# Altium PCB DSP6748_F.PcbDoc (part 4 of 16)
Units mil, origin at the board's own origin, x right, y up, seen from the top; angles counter-clockwise.
Board outline 8188.98 x 4055.12 mil, 4 copper layers (Top Layer, GND, VCC, Bottom Layer); 409 components, 262 nets, 1424 pads, 350 vias.
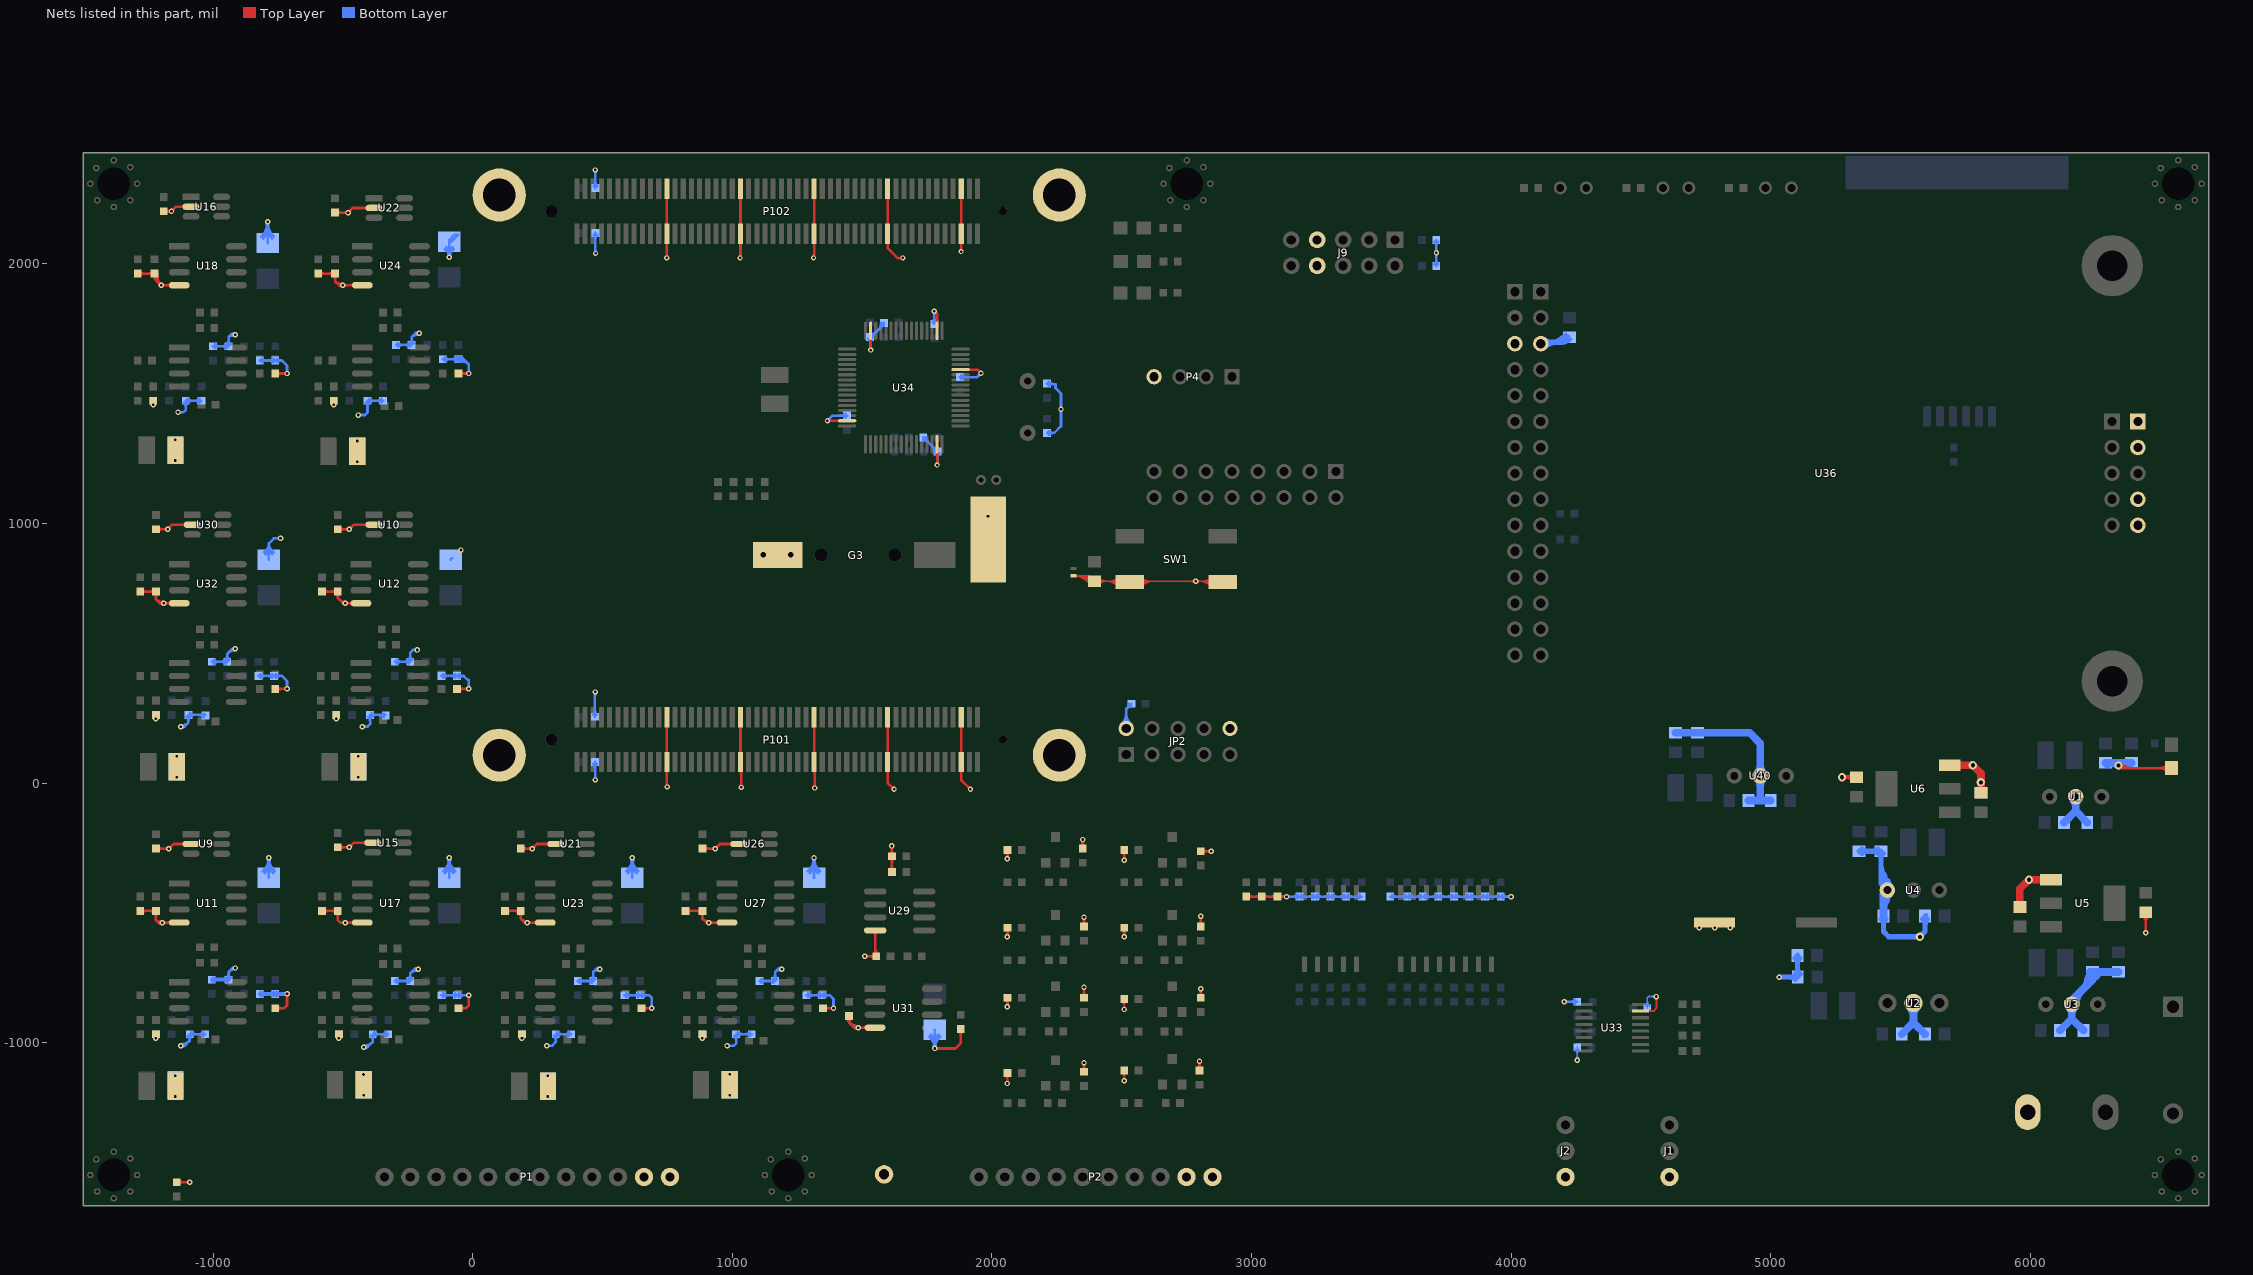
[diagram p6: the nets of this part, all layers, seen from the top]

## Via types
v1: diameter 21, hole 10, Top Layer to Bottom Layer, 244 vias
v2: diameter 20, hole 10, Top Layer to Bottom Layer, 84 vias
v3: diameter 32, hole 16, Top Layer to Bottom Layer, 11 vias
v4: diameter 24, hole 12, Top Layer to Bottom Layer, 7 vias
v5: diameter 39.37, hole 19.68, Top Layer to Bottom Layer, 3 vias
v6: diameter 30, hole 15, Top Layer to Bottom Layer, 1 vias

## Nets (pads, with @x,y where several pads share a name; then routed paths per layer and width w, separated by ;. In a path a pad name is that pad's centre, name@x,y a point inside that pad or via, vN(x,y) a via of type N, cw(c..) or ccw(c..) an arc to the next point about the centre after c; other vN are vias at no path point) (continued)
GND: (continued)
  Top Layer w10: C80.1@-1290.19,1962.52 C81.1@-1225.19,1962.52 ; C46.1@-1280.19,-492.48 C47.1@-1220.19,-492.48 -1220.19,-527.48 ; C153.1@-1280.19,737.52 C154.1@-1220.19,737.52 -1220.19,707.52 ; C50.1@-1220.19,-252.48 v1(-1170.19,-252.48) -1152.59,-234.88 U9.2@-1085.19,-234.88 ; C155.1@-1220.19,977.52 v1(-1175.19,977.52) -1157.59,995.12 U30.2@-1080.19,995.12 ; C81.1@-1215.27,1961.3 ccw(c-1162.85,1954.86) v1(-1200.19,1917.52) ; -1214.69,1932.02 cw(c-1188.67,1958.03) C81.1@-1225.19,1962.52 ; -1209.33,-538.35 ccw(c-1198.89,-527.91) v1@-1193.57,-541.68 ; -1206.22,693.55 ccw(c-1192.45,707.32) v1@-1189.51,688.07 ; v1@-1205.69,1917.52 ccw(c-1218.97,1917.52) -1209.58,1926.91 ccw(c-1200.19,1936.3) v1@-1200.19,1923.02 ; v1@-1205.5,1918.94 ccw(c-1218.33,1922.38) -1206.83,1929.02 ccw(c-1195.33,1935.66) v1@-1198.77,1922.83 ; v1@-1199.08,-541.37 ccw(c-1208.47,-550.76) -1208.47,-537.48 ccw(c-1208.47,-524.2) v1@-1199.08,-533.59 ; v1@-1197.17,-532.35 cw(c-1204.94,-512.23) -1220.19,-527.48 ; v1@-1194.08,688.63 ccw(c-1203.47,679.24) -1203.47,692.52 ccw(c-1203.47,705.8) v1@-1194.08,696.41 ; v1@-1191.02,697.96 cw(c-1196.16,731.55) -1220.19,707.52 ; C83.1@-1190.19,2202.52 v1(-1160.19,2202.52) -1142.59,2220.12 U16.2@-1085.19,2220.12 ; v1@-1175.19,983.02 ccw(c-1175.19,996.3) -1165.8,986.91 ccw(c-1156.41,977.52) v1@-1169.69,977.52 ; v1@-1170.19,-246.98 ccw(c-1170.19,-233.7) -1160.8,-243.09 ccw(c-1151.41,-252.48) v1@-1164.69,-252.48 ; v1@-1164.08,2198.63 ccw(c-1173.47,2189.24) -1173.47,2202.52 ccw(c-1173.47,2215.8) v1@-1164.08,2206.41 ; v1@-1160.19,2208.02 ccw(c-1160.19,2221.3) -1150.8,2211.91 ccw(c-1141.41,2202.52) v1@-1154.69,2202.52 ; L8.1@-1140.19,-1537.48 v1(-1090.19,-1537.48) ; U11.4@-1130.19,-537.48 -1210.19,-537.48 -1220.19,-527.48 ; U32.4@-1130.19,692.52 -1205.19,692.52 -1220.19,707.52 ; U18.4@-1130.19,1917.52 v1(-1200.19,1917.52) ; C28.1@-760.19,-867.48 -725.19,-867.48 -715.19,-857.48 v1(-715.19,-812.48) ; C137.1@-760.19,362.52 v1(-715.19,362.52) ; C60.1@-760.19,1577.52 v1(-715.19,1577.52) ; C111.1@-595.19,1962.52 C112.1@-530.19,1962.52 -530.19,1932.52 ; C78.1@-580.19,-492.48 C79.1@-520.19,-492.48 -520.19,-527.48 -510.19,-537.48 U17.4@-425.19,-537.48 ; C48.1@-580.19,737.52 C49.1@-520.19,737.52 -520.19,712.52 -500.19,692.52 U12.4@-430.19,692.52 ; C114.1@-530.19,2197.52 v1(-480.19,2197.52) -462.59,2215.12 U22.2@-380.19,2215.12 ; C82.1@-520.19,-247.48 v1(-475.19,-247.48) -457.59,-229.88 U15.2@-385.19,-229.88 ; C51.1@-520.19,977.52 v1(-475.19,977.52) -457.59,995.12 U10.2@-380.19,995.12 ; -516.65,708.98 ccw(c-490.19,735.44) v1@-490.19,698.02 ; -516.22,1918.55 ccw(c-502.45,1932.32) v1@-499.51,1913.07 ; v1@-504.08,1913.63 ccw(c-513.47,1904.24) -513.47,1917.52 ccw(c-513.47,1930.8) v1@-504.08,1921.41 ; v1@-501.02,1922.96 cw(c-506.16,1956.55) -530.19,1932.52 ; v1@-494.08,-541.37 ccw(c-503.47,-550.76) -503.47,-537.48 ccw(c-503.47,-524.2) v1@-494.08,-533.59 ; v1@-480.19,2203.02 ccw(c-480.19,2216.3) -470.8,2206.91 ccw(c-461.41,2197.52) v1@-474.69,2197.52 ; v1@-475.19,-241.98 ccw(c-475.19,-228.7) -465.8,-238.09 ccw(c-456.41,-247.48) v1@-469.69,-247.48 ; v1@-475.19,983.02 ccw(c-475.19,996.3) -465.8,986.91 ccw(c-456.41,977.52) v1@-469.69,977.52 ; U24.4@-425.19,1917.52 -515.19,1917.52 -530.19,1932.52 ; C29.1@-60.19,362.52 v1(-15.19,362.52) ; C59.1@-55.19,-867.48 -25.19,-867.48 -15.19,-857.48 v1(-15.19,-817.48) ; C92.1@-55.19,1577.52 v1(-15.19,1577.52) ; C109.1@124.81,-492.48 C110.1@184.81,-492.48 184.81,-522.48 ; C113.1@184.81,-252.48 v1(229.81,-252.48) 247.41,-234.88 U21.2@319.81,-234.88 ; v1@209.53,-531.99 cw(c207.86,-499.43) 184.81,-522.48 ; v1@229.81,-246.98 ccw(c229.81,-233.7) 239.2,-243.09 ccw(c248.59,-252.48) v1@235.31,-252.48 ; U23.4@279.81,-537.48 199.81,-537.48 184.81,-522.48 ; C91.1@649.81,-867.48 v1(689.81,-867.48) ; v2@743.75,2026.54 ccw(c733.43,2036.86) 748.03,2036.86 ; P101.23@744.6,47.96 cw(c736.33,39.69) 748.03,39.69 cw(c759.73,39.69) P101.23@751.46,47.96 ; P101.23@744.6,113.86 ccw(c736.33,122.13) 748.03,122.13 ccw(c759.73,122.13) P101.23@751.46,113.86 ; P101.24@744.6,221.18 cw(c736.33,212.91) 748.03,212.91 cw(c759.73,212.91) P101.24@751.46,221.18 ; P102.23@744.6,2082.96 cw(c736.33,2074.69) 748.03,2074.69 cw(c759.73,2074.69) P102.23@751.46,2082.96 ; P102.23@744.6,2148.86 ccw(c736.33,2157.13) 748.03,2157.13 ccw(c759.73,2157.13) P102.23@751.46,2148.86 ; P102.24@744.6,2256.18 cw(c736.33,2247.91) 748.03,2247.91 cw(c759.73,2247.91) P102.24@751.46,2256.18 ; v2@747.29,2027.26 v2@748.03,2028 ; 748.03,0.11 ccw(c764.41,0.11) v2@752.83,-11.46 ; P101.24@748.03,254.13 P101.23@748.03,80.91 748.03,-13.74 v2(749.29,-15) ; v2@748.03,2023.74 P102.23@748.03,2115.91 P102.24@748.03,2289.13 ; 748.03,2033.29 ccw(c757.58,2033.29) v2@750.83,2026.54 ; C130.1@819.81,-492.48 C131.1@884.81,-492.48 884.81,-522.48 ; C132.1@884.81,-252.48 v1(934.81,-252.48) 952.41,-234.88 U26.2@1024.81,-234.88 ; v1@909.53,-531.99 cw(c907.86,-499.43) 884.81,-522.48 ; v1@934.81,-246.98 ccw(c934.81,-233.7) 944.2,-243.09 ccw(c953.59,-252.48) v1@940.31,-252.48 ; U27.4@979.81,-537.48 899.81,-537.48 884.81,-522.48 ; v2@1026.75,2026.54 ccw(c1015.3,2037.99) 1031.5,2037.99 ; P101.41@1028.07,47.96 cw(c1013.07,32.95) 1034.29,32.95 ; P101.41@1028.07,113.86 ccw(c1019.8,122.13) 1031.5,122.13 ccw(c1043.2,122.13) P101.41@1034.93,113.86 ; P101.42@1028.07,221.18 cw(c1019.8,212.91) 1031.5,212.91 cw(c1043.2,212.91) P101.42@1034.93,221.18 ; P102.41@1028.07,2082.96 cw(c1019.8,2074.69) 1031.5,2074.69 cw(c1043.2,2074.69) P102.41@1034.93,2082.96 ; P102.41@1028.07,2148.86 ccw(c1019.8,2157.13) 1031.5,2157.13 ccw(c1043.2,2157.13) P102.41@1034.93,2148.86 ; P102.42@1028.07,2256.18 cw(c1019.8,2247.91) 1031.5,2247.91 cw(c1043.2,2247.91) P102.42@1034.93,2256.18 ; v2@1030.29,2026.79 v2@1031.5,2028 ; v2@1030.75,-13.46 ccw(c1022.22,-4.93) 1034.29,-4.93 ccw(c1046.36,-4.93) v2@1037.83,-13.46 ; P101.42@1031.5,254.13 P101.41@1031.5,80.91 1034.29,78.12 v2(1034.29,-17) ; v2@1031.5,2023 P102.41@1031.5,2115.91 P102.42@1031.5,2289.13 ; v2@1309.75,2026.54 ccw(c1297.19,2039.1) 1314.96,2039.1 ; P101.59@1311.53,47.96 cw(c1297.64,34.06) 1317.29,34.06 ; P101.59@1311.53,113.86 ccw(c1303.26,122.13) 1314.96,122.13 ccw(c1326.66,122.13) P101.59@1318.39,113.86 ; P101.60@1311.53,221.18 cw(c1303.26,212.91) 1314.96,212.91 cw(c1326.66,212.91) P101.60@1318.39,221.18 ; P102.59@1311.53,2082.96 cw(c1303.26,2074.69) 1314.96,2074.69 cw(c1326.66,2074.69) P102.59@1318.39,2082.96 ; P102.59@1311.53,2148.86 ccw(c1303.26,2157.13) 1314.96,2157.13 ccw(c1326.66,2157.13) P102.59@1318.39,2148.86 ; P102.60@1311.53,2256.18 cw(c1303.26,2247.91) 1314.96,2247.91 cw(c1326.66,2247.91) P102.60@1318.39,2256.18 ; v2@1313.29,2026.33 v2@1314.96,2028 ; v2@1313.75,-15.46 ccw(c1305.22,-6.93) 1317.29,-6.93 ccw(c1329.36,-6.93) v2@1320.83,-15.46 ; P101.60@1314.96,254.13 P101.59@1314.96,80.91 1317.29,78.58 v2(1317.29,-19) ; v2@1314.96,2023 P102.59@1314.96,2115.91 P102.60@1314.96,2289.13 ; C121.1@1349.81,-867.48 v1(1389.81,-867.48) ; v2(1366.2,1395.57) U34.47@1442.31,1395.57 ; v2@1369.73,1392.03 cw(c1378.27,1383.5) 1378.27,1395.57 cw(c1378.27,1407.64) v2@1369.73,1399.1 ; C147.1@1449.81,-897.48 1449.81,-922.48 ; 1466.89,-939.56 ccw(c1484.81,-921.63) v1@1484.81,-946.98 ; v1@1480.92,-946.37 ccw(c1471.53,-955.76) 1471.53,-942.48 ccw(c1471.53,-929.2) v1@1480.92,-938.59 ; v1@1484.81,-936.98 cw(c1484.81,-887.49) 1449.81,-922.48 ; v1(1509.81,-667.48) R89.1@1554.81,-667.48 ; v2@1529.61,1671.06 ccw(c1521.79,1678.88) 1532.86,1678.88 ; 1532.86,1680.3 ccw(c1545.93,1680.3) v2@1536.69,1671.06 ; U34.31@1532.86,1742.02 1532.86,1667.81 v2(1533.15,1667.52) ; U31.4@1549.81,-942.48 v1(1484.81,-942.48) 1469.81,-942.48 1449.81,-922.48 ; R89.1@1550.32,-662.99 U29.4@1550.32,-567.48 ; P101.77@1595,47.96 cw(c1586.73,39.69) 1598.43,39.69 cw(c1610.13,39.69) P101.77@1601.86,47.96 ; P101.77@1595,113.86 ccw(c1586.73,122.13) 1598.43,122.13 ccw(c1610.13,122.13) P101.77@1601.86,113.86 ; P101.78@1595,221.18 cw(c1586.73,212.91) 1598.43,212.91 cw(c1610.13,212.91) P101.78@1601.86,221.18 ; P102.77@1595,2082.96 cw(c1586.73,2074.69) 1598.43,2074.69 cw(c1610.13,2074.69) P102.77@1601.86,2082.96 ; P102.77@1595,2148.86 ccw(c1586.73,2157.13) 1598.43,2157.13 ccw(c1610.13,2157.13) P102.77@1601.86,2148.86 ; P102.78@1595,2256.18 cw(c1586.73,2247.91) 1598.43,2247.91 cw(c1610.13,2247.91) P102.78@1601.86,2256.18 ; P101.78@1598.43,254.13 P101.77@1598.43,80.91 1598.43,0.86 v2(1623.29,-24) ; P102.78@1598.43,2289.13 P102.77@1598.43,2115.91 1598.43,2060.86 1637.29,2022 v2@1657.29,2022 ; C152.1@1614.81,-342.48 C151.1@1614.81,-282.48 v1(1614.81,-242.48) ; v2@1618.29,-24 ccw(c1606.22,-24) 1614.75,-15.46 ccw(c1623.29,-6.93) v2@1623.29,-19 ; 1642.81,2022 ccw(c1642.81,2037.49) v2@1653.75,2026.54 ; v2@1778.15,1812.52 cw(c1778.15,1800.45) 1786.69,1808.98 cw(c1795.22,1817.52) v2@1783.15,1817.52 ; v2(1778.15,1817.52) 1788.76,1806.91 U34.18@1788.76,1742.02 ; v1(1779.81,-1022.48) 1859.81,-1022.48 1879.81,-1002.48 C150.1@1879.81,-947.48 ; v2@1785.61,1228.06 ccw(c1778.01,1235.66) 1788.76,1235.66 ; 1788.76,1237.53 ccw(c1802.16,1237.53) v2@1792.69,1228.06 ; U34.63@1788.76,1305.02 1788.76,1224.91 v2(1789.15,1224.52) ; v2@1877.75,2050.54 ccw(c1867.77,2060.52) 1881.89,2060.52 ; P101.95@1878.46,47.96 cw(c1870.19,39.69) 1881.89,39.69 cw(c1893.59,39.69) P101.95@1885.32,47.96 ; P101.95@1878.46,113.86 ccw(c1870.19,122.13) 1881.89,122.13 ccw(c1893.59,122.13) P101.95@1885.32,113.86 ; P101.96@1878.46,221.18 cw(c1870.19,212.91) 1881.89,212.91 cw(c1893.59,212.91) P101.96@1885.32,221.18 ; P102.95@1878.46,2082.96 cw(c1870.19,2074.69) 1881.89,2074.69 cw(c1893.59,2074.69) P102.95@1885.32,2082.96 ; P102.95@1878.46,2148.86 ccw(c1870.19,2157.13) 1881.89,2157.13 ccw(c1893.59,2157.13) P102.95@1885.32,2148.86 ; P102.96@1878.46,2256.18 cw(c1870.19,2247.91) 1881.89,2247.91 cw(c1893.59,2247.91) P102.96@1885.32,2256.18 ; U34.12@1879.31,1592.42 1944.25,1592.42 v2(1958.15,1578.52) ; v2(1881.29,2047) 1881.89,2047.6 P102.95@1881.89,2115.91 P102.96@1881.89,2289.13 ; P101.96@1881.89,254.13 P101.95@1881.89,80.91 1881.89,11.4 v2(1917.29,-24) ; 1881.89,2057.62 ccw(c1891.91,2057.62) v2@1884.83,2050.54 ; v2@1912.29,-24 ccw(c1900.22,-24) 1908.75,-15.46 ccw(c1917.29,-6.93) v2@1917.29,-19 ; v2@1953.15,1578.52 ccw(c1941.08,1578.52) 1949.61,1587.06 ccw(c1958.15,1595.59) v2@1958.15,1583.52 ; v1(2509.81,-297.48) R90.1@2509.81,-257.48 ; v1@2795.92,-1076.37 cw(c2786.53,-1085.76) 2799.81,-1085.76 cw(c2813.09,-1085.76) v1@2803.7,-1076.37 ; C115.1@2799.81,-1107.48 v1(2799.81,-1072.48) ; v1@2800.92,-796.37 cw(c2791.53,-805.76) 2804.81,-805.76 cw(c2818.09,-805.76) v1@2808.7,-796.37 ; C119.1@2804.81,-827.48 v1(2804.81,-792.48) ; C134.1@2804.81,-552.48 v1@2804.81,-507.48 ; C138.1@2804.81,-262.48 v1(2844.81,-262.48) ; R129.1@2979.81,-437.48 R130.1@3039.81,-437.48 R131.1@3099.81,-437.48 v1(3134.81,-437.48) ; v1@3130.92,-441.37 ccw(c3121.53,-450.76) 3121.53,-437.48 ccw(c3121.53,-424.2) v1@3130.92,-433.59 ; v3(6339.81,67.52) 6349.81,57.52 D7.K@6544.81,57.52 ; v1(6444.81,-577.48) C20.2@6444.81,-497.48 ; C80.1@-1283.12,1955.45 cw(c-1266.05,1938.38) -1266.05,1962.52 ; C80.1@-1283.12,1955.45 cw(c-1266.05,1938.38) -1266.05,1962.52 ; C80.1@-1283.12,1955.45 cw(c-1266.05,1938.38) -1266.05,1962.52 ; C80.1@-1283.12,1969.59 ccw(c-1266.05,1986.66) -1266.05,1962.52 ; C80.1@-1283.12,1969.59 ccw(c-1266.05,1986.66) -1266.05,1962.52 ; C80.1@-1283.12,1969.59 ccw(c-1266.05,1986.66) -1266.05,1962.52 ; C46.1@-1273.12,-499.55 cw(c-1256.05,-516.62) -1256.05,-492.48 ; C46.1@-1273.12,-499.55 cw(c-1256.05,-516.62) -1256.05,-492.48 ; C46.1@-1273.12,-499.55 cw(c-1256.05,-516.62) -1256.05,-492.48 ; C46.1@-1273.12,-485.41 ccw(c-1256.05,-468.34) -1256.05,-492.48 ; C46.1@-1273.12,-485.41 ccw(c-1256.05,-468.34) -1256.05,-492.48 ; C46.1@-1273.12,-485.41 ccw(c-1256.05,-468.34) -1256.05,-492.48 ; C153.1@-1273.12,730.45 cw(c-1256.05,713.38) -1256.05,737.52 ; C153.1@-1273.12,730.45 cw(c-1256.05,713.38) -1256.05,737.52 ; C153.1@-1273.12,730.45 cw(c-1256.05,713.38) -1256.05,737.52 ; C153.1@-1273.12,744.59 ccw(c-1256.05,761.66) -1256.05,737.52 ; C153.1@-1273.12,744.59 ccw(c-1256.05,761.66) -1256.05,737.52 ; C153.1@-1273.12,744.59 ccw(c-1256.05,761.66) -1256.05,737.52 ; -1249.33,1962.52 cw(c-1249.33,1938.38) C81.1@-1232.26,1955.45 ; -1249.33,1962.52 ccw(c-1249.33,1986.66) C81.1@-1232.26,1969.59 ; -1249.33,1962.52 cw(c-1249.33,1938.38) C81.1@-1232.26,1955.45 ; -1249.33,1962.52 ccw(c-1249.33,1986.66) C81.1@-1232.26,1969.59 ; -1249.33,1962.52 ccw(c-1249.33,1986.66) C81.1@-1232.26,1969.59 ; -1249.33,1962.52 cw(c-1249.33,1938.38) C81.1@-1232.26,1955.45 ; -1244.33,-492.48 cw(c-1244.33,-516.62) C47.1@-1227.26,-499.55 ; -1244.33,-492.48 ccw(c-1244.33,-468.34) C47.1@-1227.26,-485.41 ; -1244.33,-492.48 cw(c-1244.33,-516.62) C47.1@-1227.26,-499.55 ; -1244.33,-492.48 ccw(c-1244.33,-468.34) C47.1@-1227.26,-485.41 ; -1244.33,-492.48 ccw(c-1244.33,-468.34) C47.1@-1227.26,-485.41 ; -1244.33,-492.48 cw(c-1244.33,-516.62) C47.1@-1227.26,-499.55 ; -1244.33,737.52 cw(c-1244.33,713.38) C154.1@-1227.26,730.45 ; -1244.33,737.52 ccw(c-1244.33,761.66) C154.1@-1227.26,744.59 ; -1244.33,737.52 cw(c-1244.33,713.38) C154.1@-1227.26,730.45 ; -1244.33,737.52 ccw(c-1244.33,761.66) C154.1@-1227.26,744.59 ; -1244.33,737.52 ccw(c-1244.33,761.66) C154.1@-1227.26,744.59 ; -1244.33,737.52 cw(c-1244.33,713.38) C154.1@-1227.26,730.45 ; C81.1@-1231.19,1954.52 cw(c-1240.19,1942.52) -1225.19,1942.52 ; C81.1@-1231.19,1954.52 cw(c-1240.19,1942.52) -1225.19,1942.52 ; C81.1@-1231.19,1954.52 cw(c-1240.19,1942.52) -1225.19,1942.52 ; C81.1@-1231.19,1954.52 cw(c-1240.19,1942.52) -1225.19,1942.52 ; C81.1@-1231.19,1954.52 cw(c-1240.19,1942.52) -1225.19,1942.52 ; C47.1@-1227.26,-499.55 cw(c-1244.33,-516.62) -1220.19,-516.62 ; C47.1@-1227.26,-499.55 cw(c-1244.33,-516.62) -1220.19,-516.62 ; C47.1@-1227.26,-499.55 cw(c-1244.33,-516.62) -1220.19,-516.62 ; C154.1@-1227.26,730.45 cw(c-1244.33,713.38) -1220.19,713.38 ; C154.1@-1227.26,730.45 cw(c-1244.33,713.38) -1220.19,713.38 ; C154.1@-1227.26,730.45 cw(c-1244.33,713.38) -1220.19,713.38 ; -1225.19,1942.52 cw(c-1210.19,1942.52) C81.1@-1219.19,1954.52 ; -1225.19,1942.52 cw(c-1210.19,1942.52) C81.1@-1219.19,1954.52 ; -1225.19,1942.52 cw(c-1210.19,1942.52) C81.1@-1219.19,1954.52 ; -1225.19,1942.52 cw(c-1210.19,1942.52) C81.1@-1219.19,1954.52 ; -1225.19,1942.52 cw(c-1210.19,1942.52) C81.1@-1219.19,1954.52 ; -1225.19,1942.52 v1(-1200.19,1917.52) ; -1225.19,1942.52 C81.1@-1225.19,1962.52 ; C81.1@-1225.19,1962.52 ccw(c-1204.82,1953.6) -1220.55,1937.88 cw(c-1204.82,1953.6) C81.1@-1225.19,1962.52 ; -1220.19,-516.62 cw(c-1196.05,-516.62) C47.1@-1213.12,-499.55 ; -1220.19,-516.62 cw(c-1196.05,-516.62) C47.1@-1213.12,-499.55 ; -1220.19,-516.62 cw(c-1196.05,-516.62) C47.1@-1213.12,-499.55 ; -1220.19,713.38 cw(c-1196.05,713.38) C154.1@-1213.12,730.45 ; -1220.19,713.38 cw(c-1196.05,713.38) C154.1@-1213.12,730.45 ; -1220.19,713.38 cw(c-1196.05,713.38) C154.1@-1213.12,730.45 ; C50.1@-1213.12,-259.55 cw(c-1196.05,-276.62) -1196.05,-252.48 ; C50.1@-1213.12,-259.55 cw(c-1196.05,-276.62) -1196.05,-252.48 ; C50.1@-1213.12,-259.55 cw(c-1196.05,-276.62) -1196.05,-252.48 ; C50.1@-1213.12,-245.41 ccw(c-1196.05,-228.34) -1196.05,-252.48 ; C50.1@-1213.12,-245.41 ccw(c-1196.05,-228.34) -1196.05,-252.48 ; C50.1@-1213.12,-245.41 ccw(c-1196.05,-228.34) -1196.05,-252.48 ; C155.1@-1213.12,970.45 cw(c-1196.05,953.38) -1196.05,977.52 ; C155.1@-1213.12,970.45 cw(c-1196.05,953.38) -1196.05,977.52 ; C155.1@-1213.12,970.45 cw(c-1196.05,953.38) -1196.05,977.52 ; C155.1@-1213.12,984.59 ccw(c-1196.05,1001.66) -1196.05,977.52 ; C155.1@-1213.12,984.59 ccw(c-1196.05,1001.66) -1196.05,977.52 ; C155.1@-1213.12,984.59 ccw(c-1196.05,1001.66) -1196.05,977.52 ; v1@-1198.77,1922.83 cw(c-1192.1,1947.73) -1214.42,1934.84 ccw(c-1192.1,1947.73) v1@-1198.77,1922.83 ; v1@-1196.3,1913.63 cw(c-1186.91,1904.24) -1186.91,1917.52 ; v1@-1196.3,1913.63 cw(c-1186.91,1904.24) -1186.91,1917.52 ; v1@-1196.3,1913.63 cw(c-1186.91,1904.24) -1186.91,1917.52 ; v1@-1196.3,1921.41 ccw(c-1186.91,1930.8) -1186.91,1917.52 ; v1@-1196.3,1921.41 ccw(c-1186.91,1930.8) -1186.91,1917.52 ; v1@-1196.3,1921.41 ccw(c-1186.91,1930.8) -1186.91,1917.52 ; v1@-1191.3,-541.37 cw(c-1181.91,-550.76) -1181.91,-537.48 ; v1@-1191.3,-541.37 cw(c-1181.91,-550.76) -1181.91,-537.48 ; v1@-1191.3,-541.37 cw(c-1181.91,-550.76) -1181.91,-537.48 ; v1@-1191.3,-533.59 ccw(c-1181.91,-524.2) -1181.91,-537.48 ; v1@-1191.3,-533.59 ccw(c-1181.91,-524.2) -1181.91,-537.48 ; v1@-1191.3,-533.59 ccw(c-1181.91,-524.2) -1181.91,-537.48 ; -1188.47,977.52 cw(c-1188.47,964.24) v1@-1179.08,973.63 ; -1188.47,977.52 ccw(c-1188.47,990.8) v1@-1179.08,981.41 ; -1188.47,977.52 cw(c-1188.47,964.24) v1@-1179.08,973.63 ; -1188.47,977.52 ccw(c-1188.47,990.8) v1@-1179.08,981.41 ; -1188.47,977.52 ccw(c-1188.47,990.8) v1@-1179.08,981.41 ; -1188.47,977.52 cw(c-1188.47,964.24) v1@-1179.08,973.63 ; v1@-1186.3,688.63 cw(c-1176.91,679.24) -1176.91,692.52 ; v1@-1186.3,688.63 cw(c-1176.91,679.24) -1176.91,692.52 ; v1@-1186.3,688.63 cw(c-1176.91,679.24) -1176.91,692.52 ; v1@-1186.3,696.41 ccw(c-1176.91,705.8) -1176.91,692.52 ; v1@-1186.3,696.41 ccw(c-1176.91,705.8) -1176.91,692.52 ; v1@-1186.3,696.41 ccw(c-1176.91,705.8) -1176.91,692.52 ; -1183.47,-252.48 cw(c-1183.47,-265.76) v1@-1174.08,-256.37 ; -1183.47,-252.48 ccw(c-1183.47,-239.2) v1@-1174.08,-248.59 ; -1183.47,-252.48 cw(c-1183.47,-265.76) v1@-1174.08,-256.37 ; -1183.47,-252.48 ccw(c-1183.47,-239.2) v1@-1174.08,-248.59 ; -1183.47,-252.48 ccw(c-1183.47,-239.2) v1@-1174.08,-248.59 ; -1183.47,-252.48 cw(c-1183.47,-265.76) v1@-1174.08,-256.37 ; C83.1@-1183.12,2195.45 cw(c-1166.05,2178.38) v1@-1166.05,2202.52 ; C83.1@-1183.12,2195.45 cw(c-1166.05,2178.38) v1@-1166.05,2202.52 ; C83.1@-1183.12,2195.45 cw(c-1166.05,2178.38) v1@-1166.05,2202.52 ; C83.1@-1183.12,2209.59 ccw(c-1166.05,2226.66) v1@-1166.05,2202.52 ; C83.1@-1183.12,2209.59 ccw(c-1166.05,2226.66) v1@-1166.05,2202.52 ; C83.1@-1183.12,2209.59 ccw(c-1166.05,2226.66) v1@-1166.05,2202.52 ; C83.1@-1175.58,2199.97 cw(c-1171.65,2185.29) v1@-1163.24,2197.94 ; C83.1@-1175.58,2199.97 cw(c-1171.65,2185.29) v1@-1163.24,2197.94 ; C83.1@-1175.58,2199.97 cw(c-1171.65,2185.29) v1@-1163.24,2197.94 ; C83.1@-1175.58,2205.07 ccw(c-1171.65,2219.75) v1@-1163.24,2207.1 ; C83.1@-1175.58,2205.07 ccw(c-1171.65,2219.75) v1@-1163.24,2207.1 ; C83.1@-1175.58,2205.07 ccw(c-1171.65,2219.75) v1@-1163.24,2207.1 ; -1175.09,-537.48 cw(c-1175.09,-554.38) U11.4@-1163.14,-542.43 ; -1175.09,-537.48 ccw(c-1175.09,-520.58) U11.4@-1163.14,-532.53 ; -1175.09,-537.48 cw(c-1175.09,-554.38) U11.4@-1163.14,-542.43 ; -1175.09,-537.48 ccw(c-1175.09,-520.58) U11.4@-1163.14,-532.53 ; -1175.09,-537.48 ccw(c-1175.09,-520.58) U11.4@-1163.14,-532.53 ; -1175.09,-537.48 cw(c-1175.09,-554.38) U11.4@-1163.14,-542.43 ; -1175.09,692.52 cw(c-1175.09,675.62) U32.4@-1163.14,687.57 ; -1175.09,692.52 ccw(c-1175.09,709.42) U32.4@-1163.14,697.47 ; -1175.09,692.52 cw(c-1175.09,675.62) U32.4@-1163.14,687.57 ; -1175.09,692.52 ccw(c-1175.09,709.42) U32.4@-1163.14,697.47 ; -1175.09,692.52 ccw(c-1175.09,709.42) U32.4@-1163.14,697.47 ; -1175.09,692.52 cw(c-1175.09,675.62) U32.4@-1163.14,687.57 ; -1175.09,1917.52 cw(c-1175.09,1900.62) U18.4@-1163.14,1912.57 ; -1175.09,1917.52 ccw(c-1175.09,1934.42) U18.4@-1163.14,1922.47 ; -1175.09,1917.52 cw(c-1175.09,1900.62) U18.4@-1163.14,1912.57 ; -1175.09,1917.52 ccw(c-1175.09,1934.42) U18.4@-1163.14,1922.47 ; -1175.09,1917.52 ccw(c-1175.09,1934.42) U18.4@-1163.14,1922.47 ; -1175.09,1917.52 cw(c-1175.09,1900.62) U18.4@-1163.14,1912.57 ; L8.1@-1133.12,-1544.55 cw(c-1116.05,-1561.62) -1116.05,-1537.48 ; L8.1@-1133.12,-1544.55 cw(c-1116.05,-1561.62) -1116.05,-1537.48 ; L8.1@-1133.12,-1544.55 cw(c-1116.05,-1561.62) -1116.05,-1537.48 ; L8.1@-1133.12,-1530.41 ccw(c-1116.05,-1513.34) -1116.05,-1537.48 ; L8.1@-1133.12,-1530.41 ccw(c-1116.05,-1513.34) -1116.05,-1537.48 ; L8.1@-1133.12,-1530.41 ccw(c-1116.05,-1513.34) -1116.05,-1537.48 ; -1123.3,-234.88 cw(c-1123.3,-252.99) U9.2@-1110.49,-240.19 ; -1123.3,-234.88 ccw(c-1123.3,-216.78) U9.2@-1110.49,-229.58 ; -1123.3,-234.88 cw(c-1123.3,-252.99) U9.2@-1110.49,-240.19 ; -1123.3,-234.88 ccw(c-1123.3,-216.78) U9.2@-1110.49,-229.58 ; -1123.3,-234.88 ccw(c-1123.3,-216.78) U9.2@-1110.49,-229.58 ; -1123.3,-234.88 cw(c-1123.3,-252.99) U9.2@-1110.49,-240.19 ; -1123.3,2220.12 cw(c-1123.3,2202.01) U16.2@-1110.49,2214.81 ; -1123.3,2220.12 ccw(c-1123.3,2238.22) U16.2@-1110.49,2225.42 ; -1123.3,2220.12 cw(c-1123.3,2202.01) U16.2@-1110.49,2214.81 ; -1123.3,2220.12 ccw(c-1123.3,2238.22) U16.2@-1110.49,2225.42 ; -1123.3,2220.12 ccw(c-1123.3,2238.22) U16.2@-1110.49,2225.42 ; -1123.3,2220.12 cw(c-1123.3,2202.01) U16.2@-1110.49,2214.81 ; -1118.3,995.12 cw(c-1118.3,977.01) U30.2@-1105.49,989.81 ; -1118.3,995.12 ccw(c-1118.3,1013.22) U30.2@-1105.49,1000.42 ; -1118.3,995.12 cw(c-1118.3,977.01) U30.2@-1105.49,989.81 ; -1118.3,995.12 ccw(c-1118.3,1013.22) U30.2@-1105.49,1000.42 ; -1118.3,995.12 ccw(c-1118.3,1013.22) U30.2@-1105.49,1000.42 ; -1118.3,995.12 cw(c-1118.3,977.01) U30.2@-1105.49,989.81 ; -1103.47,-1537.48 cw(c-1103.47,-1550.76) v1@-1094.08,-1541.37 ; -1103.47,-1537.48 ccw(c-1103.47,-1524.2) v1@-1094.08,-1533.59 ; -1103.47,-1537.48 cw(c-1103.47,-1550.76) v1@-1094.08,-1541.37 ; -1103.47,-1537.48 ccw(c-1103.47,-1524.2) v1@-1094.08,-1533.59 ; -1103.47,-1537.48 ccw(c-1103.47,-1524.2) v1@-1094.08,-1533.59 ; -1103.47,-1537.48 cw(c-1103.47,-1550.76) v1@-1094.08,-1541.37 ; C28.1@-753.12,-874.55 cw(c-736.05,-891.62) -736.05,-867.48 ; C28.1@-753.12,-874.55 cw(c-736.05,-891.62) -736.05,-867.48 ; C28.1@-753.12,-874.55 cw(c-736.05,-891.62) -736.05,-867.48 ; C28.1@-753.12,-860.41 ccw(c-736.05,-843.34) -736.05,-867.48 ; C28.1@-753.12,-860.41 ccw(c-736.05,-843.34) -736.05,-867.48 ; C28.1@-753.12,-860.41 ccw(c-736.05,-843.34) -736.05,-867.48 ; C137.1@-753.12,355.45 cw(c-736.05,338.38) -736.05,362.52 ; C137.1@-753.12,355.45 cw(c-736.05,338.38) -736.05,362.52 ; C137.1@-753.12,355.45 cw(c-736.05,338.38) -736.05,362.52 ; C137.1@-753.12,369.59 ccw(c-736.05,386.66) -736.05,362.52 ; C137.1@-753.12,369.59 ccw(c-736.05,386.66) -736.05,362.52 ; C137.1@-753.12,369.59 ccw(c-736.05,386.66) -736.05,362.52 ; C60.1@-753.12,1570.45 cw(c-736.05,1553.38) -736.05,1577.52 ; C60.1@-753.12,1570.45 cw(c-736.05,1553.38) -736.05,1577.52 ; C60.1@-753.12,1570.45 cw(c-736.05,1553.38) -736.05,1577.52 ; C60.1@-753.12,1584.59 ccw(c-736.05,1601.66) -736.05,1577.52 ; C60.1@-753.12,1584.59 ccw(c-736.05,1601.66) -736.05,1577.52 ; C60.1@-753.12,1584.59 ccw(c-736.05,1601.66) -736.05,1577.52 ; -728.47,362.52 cw(c-728.47,349.24) v1@-719.08,358.63 ; -728.47,362.52 ccw(c-728.47,375.8) v1@-719.08,366.41 ; -728.47,362.52 cw(c-728.47,349.24) v1@-719.08,358.63 ; -728.47,362.52 ccw(c-728.47,375.8) v1@-719.08,366.41 ; -728.47,362.52 ccw(c-728.47,375.8) v1@-719.08,366.41 ; -728.47,362.52 cw(c-728.47,349.24) v1@-719.08,358.63 ; -728.47,1577.52 cw(c-728.47,1564.24) v1@-719.08,1573.63 ; -728.47,1577.52 ccw(c-728.47,1590.8) v1@-719.08,1581.41 ; -728.47,1577.52 cw(c-728.47,1564.24) v1@-719.08,1573.63 ; -728.47,1577.52 ccw(c-728.47,1590.8) v1@-719.08,1581.41 ; -728.47,1577.52 ccw(c-728.47,1590.8) v1@-719.08,1581.41 ; -728.47,1577.52 cw(c-728.47,1564.24) v1@-719.08,1573.63 ; v1@-719.08,-816.37 cw(c-728.47,-825.76) -715.19,-825.76 ; v1@-719.08,-816.37 cw(c-728.47,-825.76) -715.19,-825.76 ; v1@-719.08,-816.37 cw(c-728.47,-825.76) -715.19,-825.76 ; -715.19,-825.76 cw(c-701.91,-825.76) v1@-711.3,-816.37 ; -715.19,-825.76 cw(c-701.91,-825.76) v1@-711.3,-816.37 ; -715.19,-825.76 cw(c-701.91,-825.76) v1@-711.3,-816.37 ; C111.1@-588.12,1955.45 cw(c-571.05,1938.38) -571.05,1962.52 ; C111.1@-588.12,1955.45 cw(c-571.05,1938.38) -571.05,1962.52 ; C111.1@-588.12,1955.45 cw(c-571.05,1938.38) -571.05,1962.52 ; C111.1@-588.12,1969.59 ccw(c-571.05,1986.66) -571.05,1962.52 ; C111.1@-588.12,1969.59 ccw(c-571.05,1986.66) -571.05,1962.52 ; C111.1@-588.12,1969.59 ccw(c-571.05,1986.66) -571.05,1962.52 ; C78.1@-573.12,-499.55 cw(c-556.05,-516.62) -556.05,-492.48 ; C78.1@-573.12,-499.55 cw(c-556.05,-516.62) -556.05,-492.48 ; C78.1@-573.12,-499.55 cw(c-556.05,-516.62) -556.05,-492.48 ; C78.1@-573.12,-485.41 ccw(c-556.05,-468.34) -556.05,-492.48 ; C78.1@-573.12,-485.41 ccw(c-556.05,-468.34) -556.05,-492.48 ; C78.1@-573.12,-485.41 ccw(c-556.05,-468.34) -556.05,-492.48 ; C48.1@-573.12,730.45 cw(c-556.05,713.38) -556.05,737.52 ; C48.1@-573.12,730.45 cw(c-556.05,713.38) -556.05,737.52 ; C48.1@-573.12,730.45 cw(c-556.05,713.38) -556.05,737.52 ; C48.1@-573.12,744.59 ccw(c-556.05,761.66) -556.05,737.52 ; C48.1@-573.12,744.59 ccw(c-556.05,761.66) -556.05,737.52 ; C48.1@-573.12,744.59 ccw(c-556.05,761.66) -556.05,737.52 ; -554.33,1962.52 cw(c-554.33,1938.38) C112.1@-537.26,1955.45 ; -554.33,1962.52 ccw(c-554.33,1986.66) C112.1@-537.26,1969.59 ; -554.33,1962.52 cw(c-554.33,1938.38) C112.1@-537.26,1955.45 ; -554.33,1962.52 ccw(c-554.33,1986.66) C112.1@-537.26,1969.59 ; -554.33,1962.52 ccw(c-554.33,1986.66) C112.1@-537.26,1969.59 ; -554.33,1962.52 cw(c-554.33,1938.38) C112.1@-537.26,1955.45 ; -544.33,-492.48 cw(c-544.33,-516.62) C79.1@-527.26,-499.55 ; -544.33,-492.48 ccw(c-544.33,-468.34) C79.1@-527.26,-485.41 ; -544.33,-492.48 cw(c-544.33,-516.62) C79.1@-527.26,-499.55 ; -544.33,-492.48 ccw(c-544.33,-468.34) C79.1@-527.26,-485.41 ; -544.33,-492.48 ccw(c-544.33,-468.34) C79.1@-527.26,-485.41 ; -544.33,-492.48 cw(c-544.33,-516.62) C79.1@-527.26,-499.55 ; -544.33,737.52 cw(c-544.33,713.38) C49.1@-527.26,730.45 ; -544.33,737.52 ccw(c-544.33,761.66) C49.1@-527.26,744.59 ; -544.33,737.52 cw(c-544.33,713.38) C49.1@-527.26,730.45 ; -544.33,737.52 ccw(c-544.33,761.66) C49.1@-527.26,744.59 ; -544.33,737.52 ccw(c-544.33,761.66) C49.1@-527.26,744.59 ; -544.33,737.52 cw(c-544.33,713.38) C49.1@-527.26,730.45 ; C112.1@-537.26,1955.45 cw(c-554.33,1938.38) -530.19,1938.38 ; C112.1@-537.26,1955.45 cw(c-554.33,1938.38) -530.19,1938.38 ; C112.1@-537.26,1955.45 cw(c-554.33,1938.38) -530.19,1938.38 ; -530.19,1938.38 cw(c-506.05,1938.38) C112.1@-523.12,1955.45 ; -530.19,1938.38 cw(c-506.05,1938.38) C112.1@-523.12,1955.45 ; -530.19,1938.38 cw(c-506.05,1938.38) C112.1@-523.12,1955.45 ; C79.1@-527.26,-499.55 cw(c-544.33,-516.62) -520.19,-516.62 ; C79.1@-527.26,-499.55 cw(c-544.33,-516.62) -520.19,-516.62 ; C79.1@-527.26,-499.55 cw(c-544.33,-516.62) -520.19,-516.62 ; C49.1@-527.26,730.45 cw(c-544.33,713.38) -520.19,713.38 ; C49.1@-527.26,730.45 cw(c-544.33,713.38) -520.19,713.38 ; C49.1@-527.26,730.45 cw(c-544.33,713.38) -520.19,713.38 ; C114.1@-523.12,2190.45 cw(c-506.05,2173.38) -506.05,2197.52 ; C114.1@-523.12,2190.45 cw(c-506.05,2173.38) -506.05,2197.52 ; C114.1@-523.12,2190.45 cw(c-506.05,2173.38) -506.05,2197.52 ; C114.1@-523.12,2204.59 ccw(c-506.05,2221.66) -506.05,2197.52 ; C114.1@-523.12,2204.59 ccw(c-506.05,2221.66) -506.05,2197.52 ; C114.1@-523.12,2204.59 ccw(c-506.05,2221.66) -506.05,2197.52 ; -520.19,-516.62 cw(c-496.05,-516.62) C79.1@-513.12,-499.55 ; -520.19,-516.62 cw(c-496.05,-516.62) C79.1@-513.12,-499.55 ; -520.19,-516.62 cw(c-496.05,-516.62) C79.1@-513.12,-499.55 ; -520.19,713.38 cw(c-496.05,713.38) C49.1@-513.12,730.45 ; -520.19,713.38 cw(c-496.05,713.38) C49.1@-513.12,730.45 ; -520.19,713.38 cw(c-496.05,713.38) C49.1@-513.12,730.45 ; C82.1@-513.12,-254.55 cw(c-496.05,-271.62) -496.05,-247.48 ; C82.1@-513.12,-254.55 cw(c-496.05,-271.62) -496.05,-247.48 ; C82.1@-513.12,-254.55 cw(c-496.05,-271.62) -496.05,-247.48 ; C82.1@-513.12,-240.41 ccw(c-496.05,-223.34) -496.05,-247.48 ; C82.1@-513.12,-240.41 ccw(c-496.05,-223.34) -496.05,-247.48 ; C82.1@-513.12,-240.41 ccw(c-496.05,-223.34) -496.05,-247.48 ; C51.1@-513.12,970.45 cw(c-496.05,953.38) -496.05,977.52 ; C51.1@-513.12,970.45 cw(c-496.05,953.38) -496.05,977.52 ; C51.1@-513.12,970.45 cw(c-496.05,953.38) -496.05,977.52 ; C51.1@-513.12,984.59 ccw(c-496.05,1001.66) -496.05,977.52 ; C51.1@-513.12,984.59 ccw(c-496.05,1001.66) -496.05,977.52 ; C51.1@-513.12,984.59 ccw(c-496.05,1001.66) -496.05,977.52 ; v1@-496.3,1913.63 cw(c-486.91,1904.24) -486.91,1917.52 ; v1@-496.3,1913.63 cw(c-486.91,1904.24) -486.91,1917.52 ; v1@-496.3,1913.63 cw(c-486.91,1904.24) -486.91,1917.52 ; v1@-496.3,1921.41 ccw(c-486.91,1930.8) -486.91,1917.52 ; v1@-496.3,1921.41 ccw(c-486.91,1930.8) -486.91,1917.52 ; v1@-496.3,1921.41 ccw(c-486.91,1930.8) -486.91,1917.52 ; -493.47,2197.52 cw(c-493.47,2184.24) v1@-484.08,2193.63 ; -493.47,2197.52 ccw(c-493.47,2210.8) v1@-484.08,2201.41 ; -493.47,2197.52 cw(c-493.47,2184.24) v1@-484.08,2193.63 ; -493.47,2197.52 ccw(c-493.47,2210.8) v1@-484.08,2201.41 ; -493.47,2197.52 ccw(c-493.47,2210.8) v1@-484.08,2201.41 ; -493.47,2197.52 cw(c-493.47,2184.24) v1@-484.08,2193.63 ; -488.47,-247.48 cw(c-488.47,-260.76) v1@-479.08,-251.37 ; -488.47,-247.48 ccw(c-488.47,-234.2) v1@-479.08,-243.59 ; -488.47,-247.48 cw(c-488.47,-260.76) v1@-479.08,-251.37 ; -488.47,-247.48 ccw(c-488.47,-234.2) v1@-479.08,-243.59 ; -488.47,-247.48 ccw(c-488.47,-234.2) v1@-479.08,-243.59 ; -488.47,-247.48 cw(c-488.47,-260.76) v1@-479.08,-251.37 ; -488.47,977.52 cw(c-488.47,964.24) v1@-479.08,973.63 ; -488.47,977.52 ccw(c-488.47,990.8) v1@-479.08,981.41 ; -488.47,977.52 cw(c-488.47,964.24) v1@-479.08,973.63 ; -488.47,977.52 ccw(c-488.47,990.8) v1@-479.08,981.41 ; -488.47,977.52 ccw(c-488.47,990.8) v1@-479.08,981.41 ; -488.47,977.52 cw(c-488.47,964.24) v1@-479.08,973.63 ; v1@-486.3,-541.37 cw(c-476.91,-550.76) -476.91,-537.48 ; v1@-486.3,-541.37 cw(c-476.91,-550.76) -476.91,-537.48 ; v1@-486.3,-541.37 cw(c-476.91,-550.76) -476.91,-537.48 ; v1@-486.3,-533.59 ccw(c-476.91,-524.2) -476.91,-537.48 ; v1@-486.3,-533.59 ccw(c-476.91,-524.2) -476.91,-537.48 ; v1@-486.3,-533.59 ccw(c-476.91,-524.2) -476.91,-537.48 ; v1@-486.3,688.63 cw(c-476.91,679.24) -476.91,692.52 ; v1@-486.3,688.63 cw(c-476.91,679.24) -476.91,692.52 ; v1@-486.3,688.63 cw(c-476.91,679.24) -476.91,692.52 ; v1@-486.3,696.41 ccw(c-476.91,705.8) -476.91,692.52 ; v1@-486.3,696.41 ccw(c-476.91,705.8) -476.91,692.52 ; v1@-486.3,696.41 ccw(c-476.91,705.8) -476.91,692.52 ; -475.09,692.52 cw(c-475.09,675.62) U12.4@-463.14,687.57 ; -475.09,692.52 ccw(c-475.09,709.42) U12.4@-463.14,697.47 ; -475.09,692.52 cw(c-475.09,675.62) U12.4@-463.14,687.57 ; -475.09,692.52 ccw(c-475.09,709.42) U12.4@-463.14,697.47 ; -475.09,692.52 ccw(c-475.09,709.42) U12.4@-463.14,697.47 ; -475.09,692.52 cw(c-475.09,675.62) U12.4@-463.14,687.57 ; -470.09,-537.48 cw(c-470.09,-554.38) U17.4@-458.14,-542.43 ; -470.09,-537.48 ccw(c-470.09,-520.58) U17.4@-458.14,-532.53 ; -470.09,-537.48 cw(c-470.09,-554.38) U17.4@-458.14,-542.43 ; -470.09,-537.48 ccw(c-470.09,-520.58) U17.4@-458.14,-532.53 ; -470.09,-537.48 ccw(c-470.09,-520.58) U17.4@-458.14,-532.53 ; -470.09,-537.48 cw(c-470.09,-554.38) U17.4@-458.14,-542.43 ; -470.09,1917.52 cw(c-470.09,1900.62) U24.4@-458.14,1912.57 ; -470.09,1917.52 ccw(c-470.09,1934.42) U24.4@-458.14,1922.47 ; -470.09,1917.52 cw(c-470.09,1900.62) U24.4@-458.14,1912.57 ; -470.09,1917.52 ccw(c-470.09,1934.42) U24.4@-458.14,1922.47 ; -470.09,1917.52 ccw(c-470.09,1934.42) U24.4@-458.14,1922.47 ; -470.09,1917.52 cw(c-470.09,1900.62) U24.4@-458.14,1912.57 ; -423.3,-229.88 cw(c-423.3,-247.99) U15.2@-410.49,-235.19 ; -423.3,-229.88 ccw(c-423.3,-211.78) U15.2@-410.49,-224.58 ; -423.3,-229.88 cw(c-423.3,-247.99) U15.2@-410.49,-235.19 ; -423.3,-229.88 ccw(c-423.3,-211.78) U15.2@-410.49,-224.58 ; -423.3,-229.88 ccw(c-423.3,-211.78) U15.2@-410.49,-224.58 ; -423.3,-229.88 cw(c-423.3,-247.99) U15.2@-410.49,-235.19 ; -418.3,995.12 cw(c-418.3,977.01) U10.2@-405.49,989.81 ; -418.3,995.12 ccw(c-418.3,1013.22) U10.2@-405.49,1000.42 ; -418.3,995.12 cw(c-418.3,977.01) U10.2@-405.49,989.81 ; -418.3,995.12 ccw(c-418.3,1013.22) U10.2@-405.49,1000.42 ; -418.3,995.12 ccw(c-418.3,1013.22) U10.2@-405.49,1000.42 ; -418.3,995.12 cw(c-418.3,977.01) U10.2@-405.49,989.81 ; -418.3,2215.12 cw(c-418.3,2197.01) U22.2@-405.49,2209.81 ; -418.3,2215.12 ccw(c-418.3,2233.22) U22.2@-405.49,2220.42 ; -418.3,2215.12 cw(c-418.3,2197.01) U22.2@-405.49,2209.81 ; -418.3,2215.12 ccw(c-418.3,2233.22) U22.2@-405.49,2220.42 ; -418.3,2215.12 ccw(c-418.3,2233.22) U22.2@-405.49,2220.42 ; -418.3,2215.12 cw(c-418.3,2197.01) U22.2@-405.49,2209.81 ; C29.1@-53.12,355.45 cw(c-36.05,338.38) -36.05,362.52 ; C29.1@-53.12,355.45 cw(c-36.05,338.38) -36.05,362.52 ; C29.1@-53.12,355.45 cw(c-36.05,338.38) -36.05,362.52 ; C29.1@-53.12,369.59 ccw(c-36.05,386.66) -36.05,362.52 ; C29.1@-53.12,369.59 ccw(c-36.05,386.66) -36.05,362.52 ; C29.1@-53.12,369.59 ccw(c-36.05,386.66) -36.05,362.52 ; C59.1@-48.12,-874.55 cw(c-31.05,-891.62) -31.05,-867.48 ; C59.1@-48.12,-874.55 cw(c-31.05,-891.62) -31.05,-867.48 ; C59.1@-48.12,-874.55 cw(c-31.05,-891.62) -31.05,-867.48 ; C59.1@-48.12,-860.41 ccw(c-31.05,-843.34) -31.05,-867.48 ; C59.1@-48.12,-860.41 ccw(c-31.05,-843.34) -31.05,-867.48 ; C59.1@-48.12,-860.41 ccw(c-31.05,-843.34) -31.05,-867.48 ; C92.1@-48.12,1570.45 cw(c-31.05,1553.38) -31.05,1577.52 ; C92.1@-48.12,1570.45 cw(c-31.05,1553.38) -31.05,1577.52 ; C92.1@-48.12,1570.45 cw(c-31.05,1553.38) -31.05,1577.52 ; C92.1@-48.12,1584.59 ccw(c-31.05,1601.66) -31.05,1577.52 ; C92.1@-48.12,1584.59 ccw(c-31.05,1601.66) -31.05,1577.52 ; C92.1@-48.12,1584.59 ccw(c-31.05,1601.66) -31.05,1577.52 ; -28.47,362.52 cw(c-28.47,349.24) v1@-19.08,358.63 ; -28.47,362.52 ccw(c-28.47,375.8) v1@-19.08,366.41 ; -28.47,362.52 cw(c-28.47,349.24) v1@-19.08,358.63 ; -28.47,362.52 ccw(c-28.47,375.8) v1@-19.08,366.41 ; -28.47,362.52 ccw(c-28.47,375.8) v1@-19.08,366.41 ; -28.47,362.52 cw(c-28.47,349.24) v1@-19.08,358.63 ; -28.47,1577.52 cw(c-28.47,1564.24) v1@-19.08,1573.63 ; -28.47,1577.52 ccw(c-28.47,1590.8) v1@-19.08,1581.41 ; -28.47,1577.52 cw(c-28.47,1564.24) v1@-19.08,1573.63 ; -28.47,1577.52 ccw(c-28.47,1590.8) v1@-19.08,1581.41 ; -28.47,1577.52 ccw(c-28.47,1590.8) v1@-19.08,1581.41 ; -28.47,1577.52 cw(c-28.47,1564.24) v1@-19.08,1573.63 ; v1@-19.08,-821.37 cw(c-28.47,-830.76) -15.19,-830.76 ; v1@-19.08,-821.37 cw(c-28.47,-830.76) -15.19,-830.76 ; v1@-19.08,-821.37 cw(c-28.47,-830.76) -15.19,-830.76 ; -15.19,-830.76 cw(c-1.91,-830.76) v1@-11.3,-821.37 ; -15.19,-830.76 cw(c-1.91,-830.76) v1@-11.3,-821.37 ; -15.19,-830.76 cw(c-1.91,-830.76) v1@-11.3,-821.37 ; C109.1@131.88,-499.55 cw(c148.95,-516.62) 148.95,-492.48 ; C109.1@131.88,-499.55 cw(c148.95,-516.62) 148.95,-492.48 ; C109.1@131.88,-499.55 cw(c148.95,-516.62) 148.95,-492.48 ; C109.1@131.88,-485.41 ccw(c148.95,-468.34) 148.95,-492.48 ; C109.1@131.88,-485.41 ccw(c148.95,-468.34) 148.95,-492.48 ; C109.1@131.88,-485.41 ccw(c148.95,-468.34) 148.95,-492.48 ; 160.67,-492.48 cw(c160.67,-516.62) C110.1@177.74,-499.55 ; 160.67,-492.48 ccw(c160.67,-468.34) C110.1@177.74,-485.41 ; 160.67,-492.48 cw(c160.67,-516.62) C110.1@177.74,-499.55 ; 160.67,-492.48 ccw(c160.67,-468.34) C110.1@177.74,-485.41 ; 160.67,-492.48 ccw(c160.67,-468.34) C110.1@177.74,-485.41 ; 160.67,-492.48 cw(c160.67,-516.62) C110.1@177.74,-499.55 ; C110.1@177.74,-499.55 cw(c160.67,-516.62) 184.81,-516.62 ; C110.1@177.74,-499.55 cw(c160.67,-516.62) 184.81,-516.62 ; C110.1@177.74,-499.55 cw(c160.67,-516.62) 184.81,-516.62 ; 184.81,-516.62 cw(c208.95,-516.62) C110.1@191.88,-499.55 ; 184.81,-516.62 cw(c208.95,-516.62) C110.1@191.88,-499.55 ; 184.81,-516.62 cw(c208.95,-516.62) C110.1@191.88,-499.55 ; C113.1@191.88,-259.55 cw(c208.95,-276.62) 208.95,-252.48 ; C113.1@191.88,-259.55 cw(c208.95,-276.62) 208.95,-252.48 ; C113.1@191.88,-259.55 cw(c208.95,-276.62) 208.95,-252.48 ; C113.1@191.88,-245.41 ccw(c208.95,-228.34) 208.95,-252.48 ; C113.1@191.88,-245.41 ccw(c208.95,-228.34) 208.95,-252.48 ; C113.1@191.88,-245.41 ccw(c208.95,-228.34) 208.95,-252.48 ; v1@213.7,-541.37 cw(c223.09,-550.76) 223.09,-537.48 ; v1@213.7,-541.37 cw(c223.09,-550.76) 223.09,-537.48 ; v1@213.7,-541.37 cw(c223.09,-550.76) 223.09,-537.48 ; v1@213.7,-533.59 ccw(c223.09,-524.2) 223.09,-537.48 ; v1@213.7,-533.59 ccw(c223.09,-524.2) 223.09,-537.48 ; v1@213.7,-533.59 ccw(c223.09,-524.2) 223.09,-537.48 ; 216.53,-252.48 cw(c216.53,-265.76) v1@225.92,-256.37 ; 216.53,-252.48 ccw(c216.53,-239.2) v1@225.92,-248.59 ; 216.53,-252.48 cw(c216.53,-265.76) v1@225.92,-256.37 ; 216.53,-252.48 ccw(c216.53,-239.2) v1@225.92,-248.59 ; 216.53,-252.48 ccw(c216.53,-239.2) v1@225.92,-248.59 ; 216.53,-252.48 cw(c216.53,-265.76) v1@225.92,-256.37 ; 234.91,-537.48 cw(c234.91,-554.38) U23.4@246.86,-542.43 ; 234.91,-537.48 ccw(c234.91,-520.58) U23.4@246.86,-532.53 ; 234.91,-537.48 cw(c234.91,-554.38) U23.4@246.86,-542.43 ; 234.91,-537.48 ccw(c234.91,-520.58) U23.4@246.86,-532.53 ; 234.91,-537.48 ccw(c234.91,-520.58) U23.4@246.86,-532.53 ; 234.91,-537.48 cw(c234.91,-554.38) U23.4@246.86,-542.43 ; 281.7,-234.88 cw(c281.7,-252.99) U21.2@294.51,-240.19 ; 281.7,-234.88 ccw(c281.7,-216.78) U21.2@294.51,-229.58 ; 281.7,-234.88 cw(c281.7,-252.99) U21.2@294.51,-240.19 ; 281.7,-234.88 ccw(c281.7,-216.78) U21.2@294.51,-229.58 ; 281.7,-234.88 ccw(c281.7,-216.78) U21.2@294.51,-229.58 ; 281.7,-234.88 cw(c281.7,-252.99) U21.2@294.51,-240.19 ; C91.1@656.88,-874.55 cw(c673.95,-891.62) 673.95,-867.48 ; C91.1@656.88,-874.55 cw(c673.95,-891.62) 673.95,-867.48 ; C91.1@656.88,-874.55 cw(c673.95,-891.62) 673.95,-867.48 ; C91.1@656.88,-860.41 ccw(c673.95,-843.34) 673.95,-867.48 ; C91.1@656.88,-860.41 ccw(c673.95,-843.34) 673.95,-867.48 ; C91.1@656.88,-860.41 ccw(c673.95,-843.34) 673.95,-867.48 ; 676.53,-867.48 cw(c676.53,-880.76) v1@685.92,-871.37 ; 676.53,-867.48 ccw(c676.53,-854.2) v1@685.92,-863.59 ; 676.53,-867.48 cw(c676.53,-880.76) v1@685.92,-871.37 ; 676.53,-867.48 ccw(c676.53,-854.2) v1@685.92,-863.59 ; 676.53,-867.48 ccw(c676.53,-854.2) v1@685.92,-863.59 ; 676.53,-867.48 cw(c676.53,-880.76) v1@685.92,-871.37 ; C130.1@826.88,-499.55 cw(c843.95,-516.62) 843.95,-492.48 ; C130.1@826.88,-499.55 cw(c843.95,-516.62) 843.95,-492.48 ; C130.1@826.88,-499.55 cw(c843.95,-516.62) 843.95,-492.48 ; C130.1@826.88,-485.41 ccw(c843.95,-468.34) 843.95,-492.48 ; C130.1@826.88,-485.41 ccw(c843.95,-468.34) 843.95,-492.48 ; C130.1@826.88,-485.41 ccw(c843.95,-468.34) 843.95,-492.48 ; 860.67,-492.48 cw(c860.67,-516.62) C131.1@877.74,-499.55 ; 860.67,-492.48 ccw(c860.67,-468.34) C131.1@877.74,-485.41 ; 860.67,-492.48 cw(c860.67,-516.62) C131.1@877.74,-499.55 ; 860.67,-492.48 ccw(c860.67,-468.34) C131.1@877.74,-485.41 ; 860.67,-492.48 ccw(c860.67,-468.34) C131.1@877.74,-485.41 ; 860.67,-492.48 cw(c860.67,-516.62) C131.1@877.74,-499.55 ; C131.1@877.74,-499.55 cw(c860.67,-516.62) 884.81,-516.62 ; C131.1@877.74,-499.55 cw(c860.67,-516.62) 884.81,-516.62 ; C131.1@877.74,-499.55 cw(c860.67,-516.62) 884.81,-516.62 ; 884.81,-516.62 cw(c908.95,-516.62) C131.1@891.88,-499.55 ; 884.81,-516.62 cw(c908.95,-516.62) C131.1@891.88,-499.55 ; 884.81,-516.62 cw(c908.95,-516.62) C131.1@891.88,-499.55 ; C132.1@891.88,-259.55 cw(c908.95,-276.62) 908.95,-252.48 ; C132.1@891.88,-259.55 cw(c908.95,-276.62) 908.95,-252.48 ; C132.1@891.88,-259.55 cw(c908.95,-276.62) 908.95,-252.48 ; C132.1@891.88,-245.41 ccw(c908.95,-228.34) 908.95,-252.48 ; C132.1@891.88,-245.41 ccw(c908.95,-228.34) 908.95,-252.48 ; C132.1@891.88,-245.41 ccw(c908.95,-228.34) 908.95,-252.48 ; v1@913.7,-541.37 cw(c923.09,-550.76) 923.09,-537.48 ; v1@913.7,-541.37 cw(c923.09,-550.76) 923.09,-537.48 ; v1@913.7,-541.37 cw(c923.09,-550.76) 923.09,-537.48 ; v1@913.7,-533.59 ccw(c923.09,-524.2) 923.09,-537.48 ; v1@913.7,-533.59 ccw(c923.09,-524.2) 923.09,-537.48 ; v1@913.7,-533.59 ccw(c923.09,-524.2) 923.09,-537.48 ; 921.53,-252.48 cw(c921.53,-265.76) v1@930.92,-256.37 ; 921.53,-252.48 ccw(c921.53,-239.2) v1@930.92,-248.59 ; 921.53,-252.48 cw(c921.53,-265.76) v1@930.92,-256.37 ; 921.53,-252.48 ccw(c921.53,-239.2) v1@930.92,-248.59 ; 921.53,-252.48 ccw(c921.53,-239.2) v1@930.92,-248.59 ; 921.53,-252.48 cw(c921.53,-265.76) v1@930.92,-256.37 ; 934.91,-537.48 cw(c934.91,-554.38) U27.4@946.86,-542.43 ; 934.91,-537.48 ccw(c934.91,-520.58) U27.4@946.86,-532.53 ; 934.91,-537.48 cw(c934.91,-554.38) U27.4@946.86,-542.43 ; 934.91,-537.48 ccw(c934.91,-520.58) U27.4@946.86,-532.53 ; 934.91,-537.48 ccw(c934.91,-520.58) U27.4@946.86,-532.53 ; 934.91,-537.48 cw(c934.91,-554.38) U27.4@946.86,-542.43 ; 986.7,-234.88 cw(c986.7,-252.99) U26.2@999.51,-240.19 ; 986.7,-234.88 ccw(c986.7,-216.78) U26.2@999.51,-229.58 ; 986.7,-234.88 cw(c986.7,-252.99) U26.2@999.51,-240.19 ; 986.7,-234.88 ccw(c986.7,-216.78) U26.2@999.51,-229.58 ; 986.7,-234.88 ccw(c986.7,-216.78) U26.2@999.51,-229.58 ; 986.7,-234.88 cw(c986.7,-252.99) U26.2@999.51,-240.19 ; C121.1@1356.88,-874.55 cw(c1373.95,-891.62) 1373.95,-867.48 ; C121.1@1356.88,-874.55 cw(c1373.95,-891.62) 1373.95,-867.48 ; C121.1@1356.88,-874.55 cw(c1373.95,-891.62) 1373.95,-867.48 ; C121.1@1356.88,-860.41 ccw(c1373.95,-843.34) 1373.95,-867.48 ; C121.1@1356.88,-860.41 ccw(c1373.95,-843.34) 1373.95,-867.48 ; C121.1@1356.88,-860.41 ccw(c1373.95,-843.34) 1373.95,-867.48 ; 1376.53,-867.48 cw(c1376.53,-880.76) v1@1385.92,-871.37 ; 1376.53,-867.48 ccw(c1376.53,-854.2) v1@1385.92,-863.59 ; 1376.53,-867.48 cw(c1376.53,-880.76) v1@1385.92,-871.37 ; 1376.53,-867.48 ccw(c1376.53,-854.2) v1@1385.92,-863.59 ; 1376.53,-867.48 ccw(c1376.53,-854.2) v1@1385.92,-863.59 ; 1376.53,-867.48 cw(c1376.53,-880.76) v1@1385.92,-871.37 ; C147.1@1442.74,-904.55 cw(c1425.67,-921.62) 1449.81,-921.62 ; C147.1@1442.74,-904.55 cw(c1425.67,-921.62) 1449.81,-921.62 ; C147.1@1442.74,-904.55 cw(c1425.67,-921.62) 1449.81,-921.62 ; 1449.81,-921.62 cw(c1473.95,-921.62) C147.1@1456.88,-904.55 ; 1449.81,-921.62 cw(c1473.95,-921.62) C147.1@1456.88,-904.55 ; 1449.81,-921.62 cw(c1473.95,-921.62) C147.1@1456.88,-904.55 ; v1@1488.7,-946.37 cw(c1498.09,-955.76) 1498.09,-942.48 ; v1@1488.7,-946.37 cw(c1498.09,-955.76) 1498.09,-942.48 ; v1@1488.7,-946.37 cw(c1498.09,-955.76) 1498.09,-942.48 ; v1@1488.7,-938.59 ccw(c1498.09,-929.2) 1498.09,-942.48 ; v1@1488.7,-938.59 ccw(c1498.09,-929.2) 1498.09,-942.48 ; v1@1488.7,-938.59 ccw(c1498.09,-929.2) 1498.09,-942.48 ; 1504.91,-942.48 cw(c1504.91,-959.38) U31.4@1516.86,-947.43 ; 1504.91,-942.48 ccw(c1504.91,-925.58) U31.4@1516.86,-937.53 ; 1504.91,-942.48 cw(c1504.91,-959.38) U31.4@1516.86,-947.43 ; 1504.91,-942.48 ccw(c1504.91,-925.58) U31.4@1516.86,-937.53 ; 1504.91,-942.48 ccw(c1504.91,-925.58) U31.4@1516.86,-937.53 ; 1504.91,-942.48 cw(c1504.91,-959.38) U31.4@1516.86,-947.43 ; v1@1513.7,-671.37 cw(c1523.09,-680.76) 1523.09,-667.48 ; v1@1513.7,-671.37 cw(c1523.09,-680.76) 1523.09,-667.48 ; v1@1513.7,-671.37 cw(c1523.09,-680.76) 1523.09,-667.48 ; v1@1513.7,-663.59 ccw(c1523.09,-654.2) 1523.09,-667.48 ; v1@1513.7,-663.59 ccw(c1523.09,-654.2) 1523.09,-667.48 ; v1@1513.7,-663.59 ccw(c1523.09,-654.2) 1523.09,-667.48 ; 1530.67,-667.48 cw(c1530.67,-691.62) R89.1@1547.74,-674.55 ; 1530.67,-667.48 ccw(c1530.67,-643.34) R89.1@1547.74,-660.41 ; 1530.67,-667.48 cw(c1530.67,-691.62) R89.1@1547.74,-674.55 ; 1530.67,-667.48 ccw(c1530.67,-643.34) R89.1@1547.74,-660.41 ; 1530.67,-667.48 ccw(c1530.67,-643.34) R89.1@1547.74,-660.41 ; 1530.67,-667.48 cw(c1530.67,-691.62) R89.1@1547.74,-674.55 ; U29.4@1545.51,-572.3 cw(c1533.88,-583.92) 1550.32,-583.92 ; U29.4@1545.51,-572.3 cw(c1533.88,-583.92) 1550.32,-583.92 ; U29.4@1545.51,-572.3 cw(c1533.88,-583.92) 1550.32,-583.92 ; 1550.32,-632.5 ccw(c1589.79,-632.5) R89.1@1561.88,-660.41 ; 1550.32,-632.5 ccw(c1589.79,-632.5) R89.1@1561.88,-660.41 ; 1550.32,-632.5 ccw(c1589.79,-632.5) R89.1@1561.88,-660.41 ; 1550.32,-583.92 cw(c1566.76,-583.92) U29.4@1555.14,-572.3 ; 1550.32,-583.92 cw(c1566.76,-583.92) U29.4@1555.14,-572.3 ; 1550.32,-583.92 cw(c1566.76,-583.92) U29.4@1555.14,-572.3 ; C152.1@1607.74,-335.41 ccw(c1590.67,-318.34) 1614.81,-318.34 ; C152.1@1607.74,-335.41 ccw(c1590.67,-318.34) 1614.81,-318.34 ; C152.1@1607.74,-335.41 ccw(c1590.67,-318.34) 1614.81,-318.34 ; C151.1@1607.74,-289.55 cw(c1590.67,-306.62) 1614.81,-306.62 ; C151.1@1607.74,-289.55 cw(c1590.67,-306.62) 1614.81,-306.62 ; C151.1@1607.74,-289.55 cw(c1590.67,-306.62) 1614.81,-306.62 ; C151.1@1607.74,-275.41 ccw(c1590.67,-258.34) 1614.81,-258.34 ; C151.1@1607.74,-275.41 ccw(c1590.67,-258.34) 1614.81,-258.34 ; C151.1@1607.74,-275.41 ccw(c1590.67,-258.34) 1614.81,-258.34 ; v1@1610.92,-246.37 cw(c1601.53,-255.76) 1614.81,-255.76 ; v1@1610.92,-246.37 cw(c1601.53,-255.76) 1614.81,-255.76 ; v1@1610.92,-246.37 cw(c1601.53,-255.76) 1614.81,-255.76 ; 1614.81,-318.34 ccw(c1638.95,-318.34) C152.1@1621.88,-335.41 ; 1614.81,-318.34 ccw(c1638.95,-318.34) C152.1@1621.88,-335.41 ; 1614.81,-318.34 ccw(c1638.95,-318.34) C152.1@1621.88,-335.41 ; 1614.81,-306.62 cw(c1638.95,-306.62) C151.1@1621.88,-289.55 ; 1614.81,-306.62 cw(c1638.95,-306.62) C151.1@1621.88,-289.55 ; 1614.81,-306.62 cw(c1638.95,-306.62) C151.1@1621.88,-289.55 ; 1614.81,-258.34 ccw(c1638.95,-258.34) C151.1@1621.88,-275.41 ; 1614.81,-258.34 ccw(c1638.95,-258.34) C151.1@1621.88,-275.41 ; 1614.81,-258.34 ccw(c1638.95,-258.34) C151.1@1621.88,-275.41 ; 1614.81,-255.76 cw(c1628.09,-255.76) v1@1618.7,-246.37 ; 1614.81,-255.76 cw(c1628.09,-255.76) v1@1618.7,-246.37 ; 1614.81,-255.76 cw(c1628.09,-255.76) v1@1618.7,-246.37 ; v1@1783.7,-1026.37 cw(c1793.09,-1035.76) 1793.09,-1022.48 ; v1@1783.7,-1026.37 cw(c1793.09,-1035.76) 1793.09,-1022.48 ; v1@1783.7,-1026.37 cw(c1793.09,-1035.76) 1793.09,-1022.48 ; v1@1783.7,-1018.59 ccw(c1793.09,-1009.2) 1793.09,-1022.48 ; v1@1783.7,-1018.59 ccw(c1793.09,-1009.2) 1793.09,-1022.48 ; v1@1783.7,-1018.59 ccw(c1793.09,-1009.2) 1793.09,-1022.48 ; C150.1@1872.74,-954.55 cw(c1855.67,-971.62) 1879.81,-971.62 ; C150.1@1872.74,-954.55 cw(c1855.67,-971.62) 1879.81,-971.62 ; C150.1@1872.74,-954.55 cw(c1855.67,-971.62) 1879.81,-971.62 ; 1879.81,-971.62 cw(c1903.95,-971.62) C150.1@1886.88,-954.55 ; 1879.81,-971.62 cw(c1903.95,-971.62) C150.1@1886.88,-954.55 ; 1879.81,-971.62 cw(c1903.95,-971.62) C150.1@1886.88,-954.55 ; R90.1@2502.74,-264.55 cw(c2485.67,-281.62) 2509.81,-281.62 ; R90.1@2502.74,-264.55 cw(c2485.67,-281.62) 2509.81,-281.62 ; R90.1@2502.74,-264.55 cw(c2485.67,-281.62) 2509.81,-281.62 ; v1@2505.92,-293.59 ccw(c2496.53,-284.2) 2509.81,-284.2 ; v1@2505.92,-293.59 ccw(c2496.53,-284.2) 2509.81,-284.2 ; v1@2505.92,-293.59 ccw(c2496.53,-284.2) 2509.81,-284.2 ; 2509.81,-284.2 ccw(c2523.09,-284.2) v1@2513.7,-293.59 ; 2509.81,-284.2 ccw(c2523.09,-284.2) v1@2513.7,-293.59 ; 2509.81,-284.2 ccw(c2523.09,-284.2) v1@2513.7,-293.59 ; 2509.81,-281.62 cw(c2533.95,-281.62) R90.1@2516.88,-264.55 ; 2509.81,-281.62 cw(c2533.95,-281.62) R90.1@2516.88,-264.55 ; 2509.81,-281.62 cw(c2533.95,-281.62) R90.1@2516.88,-264.55 ; C115.1@2792.74,-1100.41 ccw(c2775.67,-1083.34) 2799.81,-1083.34 ; C115.1@2792.74,-1100.41 ccw(c2775.67,-1083.34) 2799.81,-1083.34 ; C115.1@2792.74,-1100.41 ccw(c2775.67,-1083.34) 2799.81,-1083.34 ; C119.1@2797.74,-820.41 ccw(c2780.67,-803.34) 2804.81,-803.34 ; C119.1@2797.74,-820.41 ccw(c2780.67,-803.34) 2804.81,-803.34 ; C119.1@2797.74,-820.41 ccw(c2780.67,-803.34) 2804.81,-803.34 ; C134.1@2797.74,-545.41 ccw(c2780.67,-528.34) 2804.81,-528.34 ; C134.1@2797.74,-545.41 ccw(c2780.67,-528.34) 2804.81,-528.34 ; C134.1@2797.74,-545.41 ccw(c2780.67,-528.34) 2804.81,-528.34 ; 2799.81,-1083.34 ccw(c2823.95,-1083.34) C115.1@2806.88,-1100.41 ; 2799.81,-1083.34 ccw(c2823.95,-1083.34) C115.1@2806.88,-1100.41 ; 2799.81,-1083.34 ccw(c2823.95,-1083.34) C115.1@2806.88,-1100.41 ; v1@2800.92,-516.37 cw(c2791.53,-525.76) 2804.81,-525.76 ; v1@2800.92,-516.37 cw(c2791.53,-525.76) 2804.81,-525.76 ; v1@2800.92,-516.37 cw(c2791.53,-525.76) 2804.81,-525.76 ; 2804.81,-803.34 ccw(c2828.95,-803.34) C119.1@2811.88,-820.41 ; 2804.81,-803.34 ccw(c2828.95,-803.34) C119.1@2811.88,-820.41 ; 2804.81,-803.34 ccw(c2828.95,-803.34) C119.1@2811.88,-820.41 ; 2804.81,-528.34 ccw(c2828.95,-528.34) C134.1@2811.88,-545.41 ; 2804.81,-528.34 ccw(c2828.95,-528.34) C134.1@2811.88,-545.41 ; 2804.81,-528.34 ccw(c2828.95,-528.34) C134.1@2811.88,-545.41 ; 2804.81,-525.76 cw(c2818.09,-525.76) v1@2808.7,-516.37 ; 2804.81,-525.76 cw(c2818.09,-525.76) v1@2808.7,-516.37 ; 2804.81,-525.76 cw(c2818.09,-525.76) v1@2808.7,-516.37 ; C138.1@2811.88,-269.55 cw(c2828.95,-286.62) 2828.95,-262.48 ; C138.1@2811.88,-269.55 cw(c2828.95,-286.62) 2828.95,-262.48 ; C138.1@2811.88,-269.55 cw(c2828.95,-286.62) 2828.95,-262.48 ; C138.1@2811.88,-255.41 ccw(c2828.95,-238.34) 2828.95,-262.48 ; C138.1@2811.88,-255.41 ccw(c2828.95,-238.34) 2828.95,-262.48